# EAGLE board v1 (EAGLE 6.4)
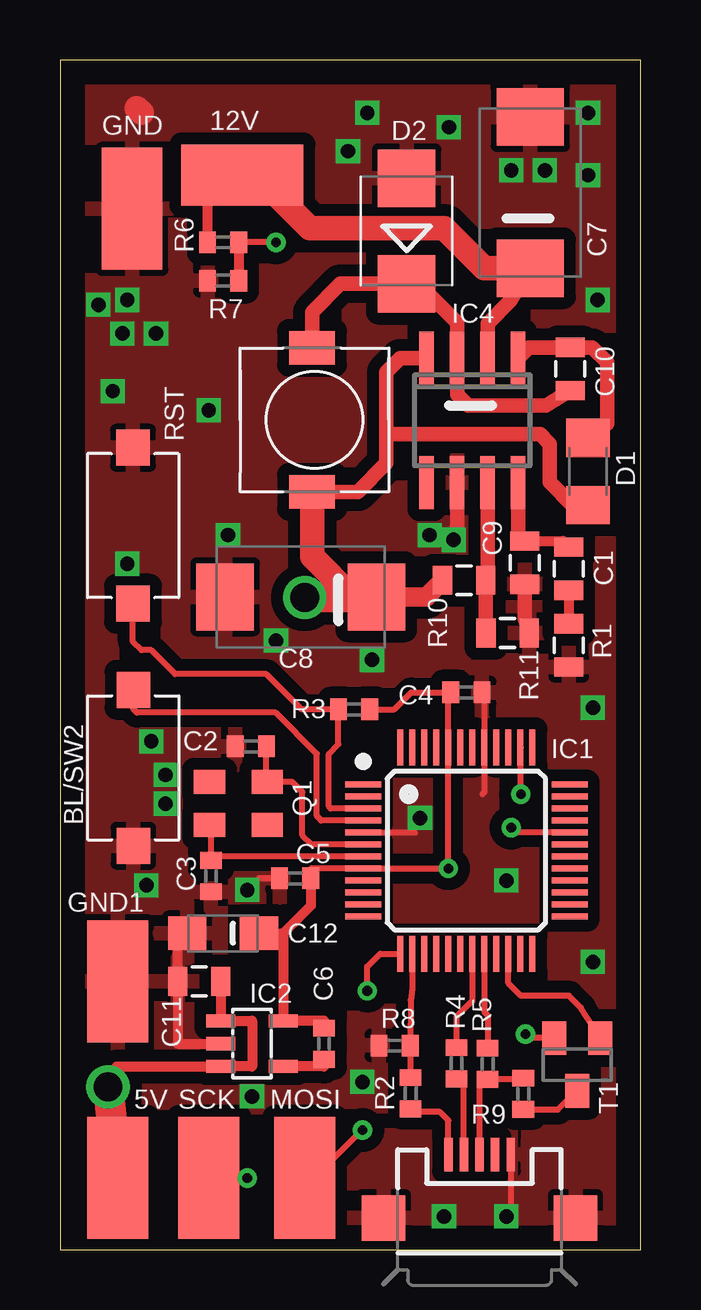
[diagram p0: board, top side]
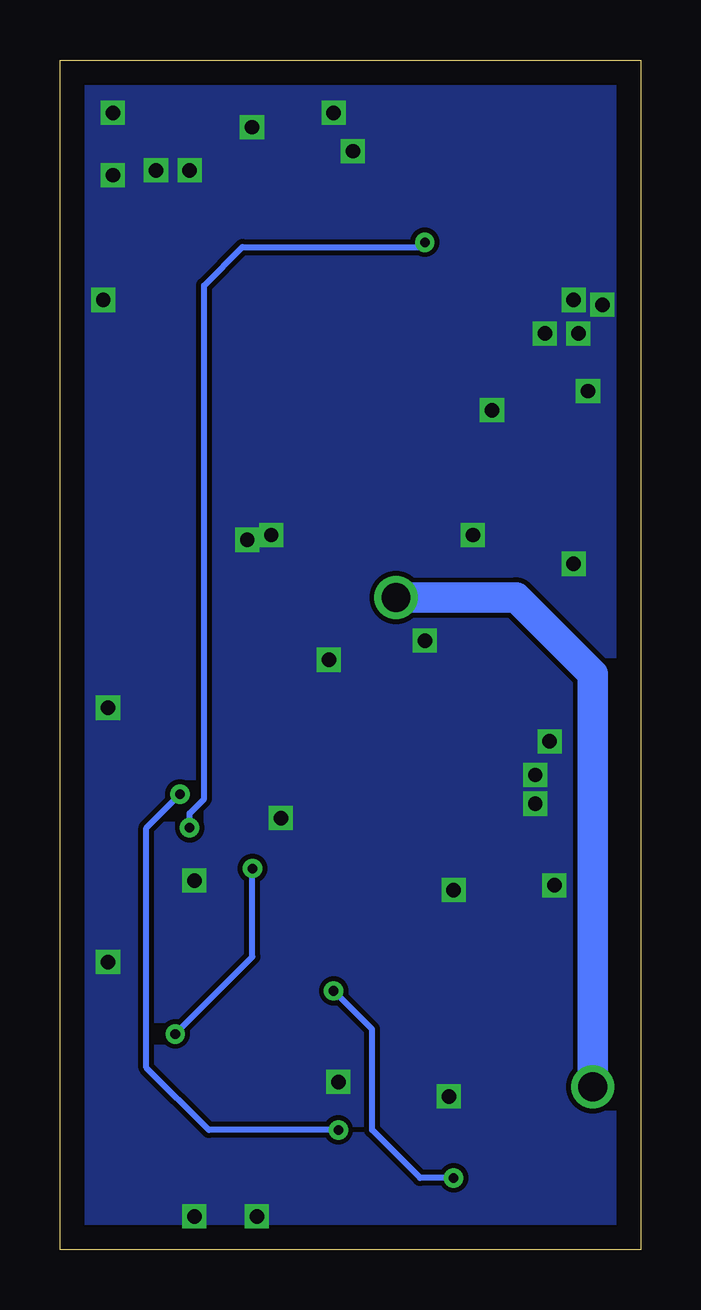
[diagram p1: board, bottom side, seen from below]

Size 24.2 x 49.6 mm. Coordinates in mm from the lower left corner, seen from the top.
Outline: 0,0 24.2,0 24.2,49.6 0,49.6 0,0
Copper layers (1*16): Top 0.035mm / dielectric 1.5mm / Bottom 0.035mm
Design rules "default *": minimum track width 10mil, minimum drill 24mil, track to track 8mil, track to pad 8mil, pad to pad 8mil, via to via 8mil, smd to smd 8mil, copper to edge 40mil, drill to drill 8mil, minimum pad ring 10mil, minimum via ring 8mil, stop-mask expansion 4mil, vias tented up to drill 24mil, thermal gap 10mil

## Footprints (pad centres in the part's own frame; a part is rotated, then mirrored left to right if it is on the bottom)
SMD2,54-5,08 = smd 2.54 x 5.08: 1 0,0
SWITCH_MCTAEF = smd 1.5 x 1.4: 1 -3.25,0; 2 3.25,0
0805 = smd 0.8 x 1.2: 1 -0.9,0; 2 0.9,0
C0402 = smd 0.7 x 0.9: 1 -0.65,0; 2 0.65,0
SMC_D = smd 2.4 x 2.8: + -3.15,0; - 3.15,0
SMC_A = smd 1.6 x 1.4: + -1.5,0; - 1.5,0
1206 = smd 1.6 x 1.8: 1 -1.4,0; 2 1.4,0
SMB = smd 2.4 x 2.4: A 2.2,0; C -2.2,0
LQFP48 = smd 1.5 x 0.25: 1 -4.3,2.75; 2 -4.3,2.25; 3 -4.3,1.75; 4 -4.3,1.25; 5 -4.3,0.75; 6 -4.3,0.25; 7 -4.3,-0.25; 8 -4.3,-0.75; 9 -4.3,-1.25; 10 -4.3,-1.75; 11 -4.3,-2.25; 12 -4.3,-2.75; 25 4.3,-2.75; 26 4.3,-2.25; 27 4.3,-1.75; 28 4.3,-1.25; 29 4.3,-0.75; 30 4.3,-0.25; 31 4.3,0.25; 32 4.3,0.75; 33 4.3,1.25; 34 4.3,1.75; 35 4.3,2.25; 36 4.3,2.75 | smd 0.25 x 1.5: 13 -2.75,-4.3; 14 -2.25,-4.3; 15 -1.75,-4.3; 16 -1.25,-4.3; 17 -0.75,-4.3; 18 -0.25,-4.3; 19 0.25,-4.3; 20 0.75,-4.3; 21 1.25,-4.3; 22 1.75,-4.3; 23 2.25,-4.3; 24 2.75,-4.3; 37 2.75,4.3; 38 2.25,4.3; 39 1.75,4.3; 40 1.25,4.3; 41 0.75,4.3; 42 0.25,4.3; 43 -0.25,4.3; 44 -0.75,4.3; 45 -1.25,4.3; 46 -1.75,4.3; 47 -2.25,4.3; 48 -2.75,4.3
SOT23-5L = smd 0.55 x 1.2: 1 -0.95,-1.3; 2 0,-1.3; 3 0.95,-1.3; 4 0.95,1.3; 5 -0.95,1.3
SO-08 = smd 0.6 x 2.2: 1 -1.905,-2.6; 2 -0.635,-2.6; 3 0.635,-2.6; 4 1.905,-2.6; 5 1.905,2.6; 6 0.635,2.6; 7 -0.635,2.6; 8 -1.905,2.6
PIS2408 = smd 1.4 x 1.9: P$1 -3,-0.1; P$2 3,-0.1
MT = smd 1.3 x 1: 1 1.2,0.9; 2 -1.2,0.9; 3 -1.2,-0.9; 4 1.2,-0.9
R0402 = smd 0.7 x 0.9: 1 -0.65,0; 2 0.65,0
SOT23 = smd 1 x 1.4: 1 -0.95,-1.1; 2 0.95,-1.1; 3 0,1.1
USB-MICROB = smd 0.35 x 1.4: D+ 0,2.65; D- -0.65,2.65; GND 1.3,2.65; ID 0.65,2.65; VBUS -1.3,2.65 | smd 1.8 x 1.9: MT1 -4,0; MT2 4,0

## Placement (x,y rotation side)
5V  [SMD2,54-5,08]  2.4,3 0 top
12V  [SMD2,54-5,08]  7.6,44.8 270 top
BL/SW2  SWITCH_MCTAEF  [SWITCH_MCTAEF]  3.06,20.1 90 top
C1  3,3nF  [0805]  21.2,28.4 270 top
C2  22pF  [C0402]  7.95,20.99 0 top
C3  22pF  [C0402]  6.29,15.58 90 top
C4  100nF  [C0402]  16.93,23.24 180 top
C5  100nF  [C0402]  9.8,15.49 0 top
C6  10nF  [C0402]  11,8.6 90 top
C7  10µF/35V  [SMC_D]  19.59,44.07 90 top
C8  100µF/6V  [SMC_D]  10.03,27.22 180 top
C9  470pF  [0805]  19.37,28.65 270 top
C10  100nF  [0805]  21.26,36.72 270 top
C11  1µF  [0805]  5.8,11.2 180 top
C12  [SMC_A]  6.8,13.2 180 top
D1  4148  [1206]  22,32.45 270 top
D2  MBRS140  [SMB]  14.44,42.47 90 top
GND  [SMD2,54-5,08]  3,43.4 180 top
GND1  [SMD2,54-5,08]  2.4,11.2 180 top
IC1  [LQFP48]  16.93,16.65 0 top
IC2  LT1761  [SOT23-5L]  8,8.6 270 top
IC4  LT1376-ADJ  [SO-08]  17.18,34.58 180 top
L2  20µH/xxx mA  [PIS2408]  10.6,34.6 270 top
MOSI  [SMD2,54-5,08]  10.2,3 0 top
Q1  12Mhz  [MT]  7.43,18.61 180 top
R1  3,3k  [0805]  21.2,25.2 90 top
R2  15k  [R0402]  14.61,6.53 90 top
R3  15k  [R0402]  12.25,22.53 0 top
R4  33R  [R0402]  16.52,7.78 270 top
R5  33R  [R0402]  17.82,7.76 270 top
R6  15k  [R0402]  6.8,42 0 top
R7  15k  [R0402]  6.8,40.4 0 top
R8  15k  [R0402]  13.94,8.52 0 top
R9  1k5  [R0402]  19.3,6.51 270 top
R10  1k82  [0805]  16.84,27.91 180 top
R11  5k  [0805]  18.65,25.71 180 top
RST  SWITCH_MCTAEF  [SWITCH_MCTAEF]  3.04,30.19 270 top
SCK  [SMD2,54-5,08]  6.2,3 0 top
T1  Si2301DS  [SOT23]  21.55,7.73 180 top
X1  USB-MICROB  [USB-MICROB]  17.48,1.33 0 top

## Library data of the parts
5V 12V GND GND1 MOSI SCK = wirepad
BL/SW2 IC2 L2 Q1 RST = seb
C1 C9 C10 D1 R1 R10 R11 T1 = SparkFun
C2-C6 C12 R2-R9 = rcl
C7 C8 = resistor
C11 = SparkFun-Capacitors
D2 = diode
IC1 = microbuilder
IC4 = v-reg
X1 = SparkFun-Connectors

## Nets
01: BL/SW2.2 IC1.4
06: IC1.22 T1.1
+3V3: C4.2 C5.2 C6.2 C12.+ IC1.8 IC1.44 IC2.5 R3.2 T1.2
+5V: 5V.1 C8.+ C11.1 D1.2 IC2.1 IC2.3 IC4.4 L2.P$2 R10.2
+5V_USB: R2.1 X1.VBUS
+12V: 12V.1 C7.+ IC4.2 R6.1
ADC: IC1.32 R6.2 R7.2
GND: BL/SW2.1 C2.1 C3.1 C4.1 C5.1 C7.- C8.- C9.2 C11.2 C12.- D2.A GND1.1 GND.1 IC1.5 IC1.41 IC2.2 IC4.6 R1.1 R7.1 R8.1 R11.1 RST.1 X1.GND X1.MT1 X1.MT2
N$1: C1.2 R1.2
N$2: R5.2 R9.1 X1.D+
N$3: C3.2 IC1.7 Q1.1
N$4: C2.2 IC1.6 Q1.3
N$6: C6.1 IC2.4
N$7: IC1.13 SCK.1
N$8: IC1.38 MOSI.1
N$10: IC4.7 R10.1 R11.2
N$11: R4.2 X1.D-
N$14: IC1.19 R4.1
N$20: R9.2 T1.3
N$24: IC1.20 R5.1
N$56: C1.1 C9.1 IC4.8
N$57: C10.2 D2.C IC4.3 L2.P$1
N$58: C10.1 D1.1 IC4.1
RST: IC1.3 R3.1 RST.2
VBUS: IC1.14 R2.2 R8.2

## Tracks (layer width: path | path; a pad name or v marks a point on that pad's centre or on a via)
01
  Top 0.25: IC1.4 10.88,17.9 10.7,18.08 10.7,20.68
  Top 0.254: 10.7,20.68 8.98,22.4 3.2,22.4 3.06,22.54 BL/SW2.2
06
  Top 0.254: T1.1 21.7,10.1 21.2,10.6 19.2,10.6 18.68,11.12 IC1.22
+3V3  (via drill 0.4)
  Top 0.25: 15.8,15.9 IC1.8 10.45,15.9 C5.2 | v16.18,15.9 IC1.44 16.18,22.88 C4.2
  Top 0.254: R3.2 13.93,22.53 14.64,23.24 C4.2 | T1.2 19.6,8.83 v19.4,9 | v16.18,15.9 15.8,15.9
  Top 0.406: C6.2 11,9.55 IC2.5 9.3,13.2 | C12.+ 9.3,13.2 | C5.2 10.45,14.35 9.3,13.2
  Bottom 0.254: v19.4,9 16.18,12.22 v16.18,15.9
+5V  (via drill 1.2)
  Top 0.406: C11.1 IC2.1 8,9.55 8,7.65 IC2.3 2.35,7.65 5V.1
  Top 0.61: D1.2 21.35,31.05 20.4,32 20.4,33.6 20,34 13.6,34 | IC4.4 14.18,37.18 13.6,36.6 13.6,34 | 13.6,34 13.6,32.8 12.4,31.6 L2.P$2
  Top 0.813: R10.2 15.25,27.22 C8.+
  Top 1.016: L2.P$2 10.5,28.9 12.18,27.22 C8.+
  Top 1.27: 12.18,27.22 10.82,27.22 v10.2,27.2 | v2,6.8 5V.1
  Bottom 1.27: v10.2,27.2 5.2,27.2 2,24 v2,6.8
+5V_USB
  Top 0.25: X1.VBUS 16.18,5.4 15.83,5.75 14.98,5.75 14.72,6.01 R2.1
+12V
  Top 0.406: R6.1 6.15,45.55 12V.1
  Top 0.61: IC4.2 17.82,38.62 18.79,39.59 C7.+
  Top 1.016: C7.+ 17.68,40.92 16,42.6 10.4,42.6 8.2,44.8 12V.1
ADC  (via drill 0.4)
  Top 0.254: IC1.32 19,17.4 v18.8,17.6 | v9,42 R6.2
  Top 0.406: R6.2 R7.2
  Bottom 0.254: v18.8,17.6 18.8,18.2 18.2,18.8 18.2,40.2 16.6,41.8 9.2,41.8 v9,42
GND  (via drill 0.6)
  Top 0.254: IC1.41 17.68,19.08 17.6,19 | 17.68,23.15 17.68,21.28 | IC1.5 14.8,17.4 | C5.1 8.29,15.49 v7.8,15 | X1.GND 18.78,1.58 v18.6,1.4
  Top 0.406: C4.1 17.68,23.15 | C12.- 4.9,13.2 C11.2 4.9,8.6 IC2.2
  Top 0.61: C9.2 19.37,26.29 R11.1 | IC4.6 16.55,30.14 v16.4,29.6
  Top 1.016: 3.4,47.4 3.2,47.6
  other vias: 7,29.8 3.6,15.2 4.4,18.6 22.2,12 2.2,35.8 18.6,15.4 2.8,28.6 15.4,29.8 16,1.4 15,18 12,45.8 12.8,47.4 22,47.4 22,44.8 22.4,39.6 22.2,22.6 13,24.6 6.2,35 12.6,7 8,6.4 4.4,19.8 9,25.4 3.8,21.2 4,38.2 2.6,38.2 2.8,39.6 1.6,39.4 18.8,45 20.2,45 16.2,46.8
  pour Bottom: 0.6,52 24.2,51.8 24.2,-0.2 0.6,0
  pour Top (isolate 0.5, rank 2): 0.6,0 24.2,-0.2 24.2,51.8 0.6,52
N$1
  Top 0.406: C1.2 R1.2
N$2
  Top 0.25: X1.D+ 17.48,6.91 17.68,7.11 R5.2 19.23,7.11 R9.1
N$3
  Top 0.25: IC1.7 6.29,16.4 C3.2 6.29,17.71 Q1.1
N$4
  Top 0.25: C2.2 8.6,19.51 Q1.3 9.67,19.51 10.1,19.08 10.1,17.28 10.48,16.9 IC1.6
N$6
  Top 0.406: C6.1 11,7.65 IC2.4
N$7  (via drill 0.4)
  Top 0.254: SCK.1 v7.8,3 | v12.8,10.8 12.8,11.8 13.35,12.35 IC1.13
  Bottom 0.254: v7.8,3 9.2,3 11.2,5 11.2,9.2 v12.8,10.8
N$8  (via drill 0.4)
  Top 0.254: MOSI.1 10.6,3 v12.6,5 | v19.2,19 19.2,20.93 IC1.38
  Bottom 0.254: v12.6,5 18,5 20.6,7.6 20.6,17.6 v19.2,19
N$10
  Top 0.61: IC4.7 17.82,28.19 R10.1 17.74,26.12 R11.2 17.65,25.61
N$11
  Top 0.25: X1.D- 16.83,7.07 R4.2
N$14
  Top 0.254: IC1.19 17.18,10.38 16.52,9.72 R4.1
N$20
  Top 0.25: R9.2 20.75,5.86 T1.3
N$24
  Top 0.254: IC1.20 17.68,9.92 17.82,9.78 R5.1
N$56
  Top 0.406: C9.1 20.95,29.55 C1.1
  Top 0.61: C9.1 19.09,29.77 IC4.8
N$57
  Top 0.61: C10.2 20.24,35.2 17,35.2 16.55,35.66 IC4.3 16.55,38.66 14.93,40.27 D2.C 11.67,40.27 10.5,39.1 L2.P$1
N$58
  Top 0.61: IC4.1 19.53,37.62 C10.1 22.18,37.62 22.8,37 22.8,34.45 D1.1
RST
  Top 0.25: IC1.3 11.28,18.4 11.2,18.48 11.2,20.68
  Top 0.254: 11.2,20.68 11.6,21.08 R3.1 10.07,22.53 8.6,24 4.8,24 3.8,25 3.4,25 3.04,25.36 RST.2
VBUS
  Top 0.25: R2.2 14.61,8.22 R8.2
  Top 0.254: IC1.14 14.68,10.88 14.61,10.41 R8.2

## Text on the board
tNames: Q1
tValues: lpc1347 | 12Mhz